# EAGLE board hwreset_v2 (EAGLE 6.1)
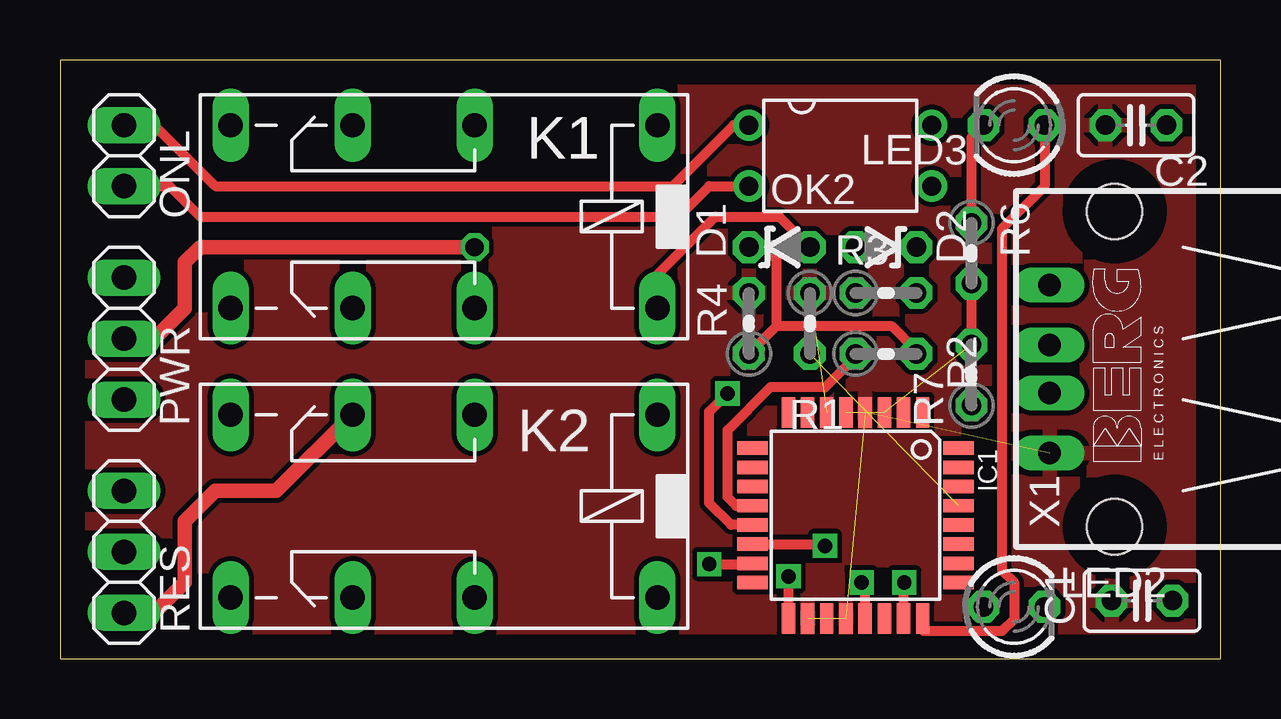
[diagram p0: board, top side]
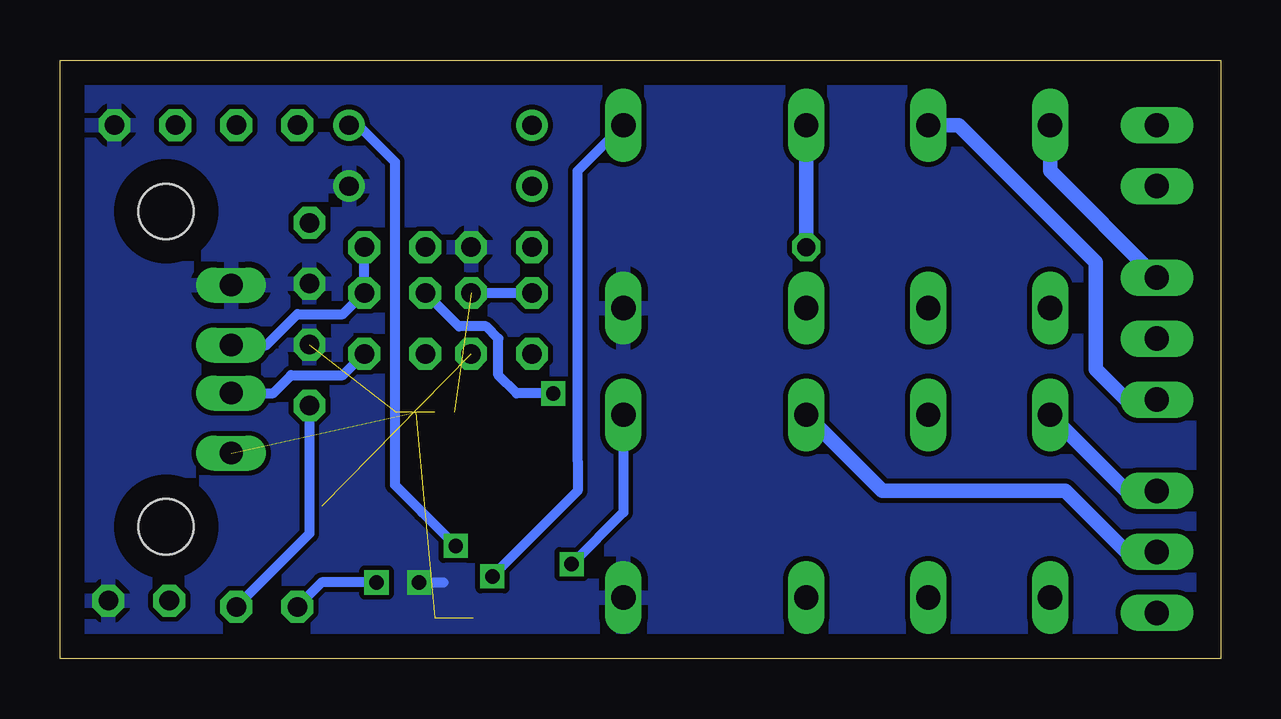
[diagram p1: board, bottom side, seen from below]

Size 48.37 x 24.94 mm. Coordinates in mm from the lower left corner, seen from the top.
Outline: 0,0 48.37,0 48.37,24.94 0,24.94 0,0
Copper layers (1*16): Top 0.035mm / dielectric 1.5mm / Bottom 0.035mm
Design rules: minimum track width 10mil, minimum drill 24mil, track to track 8mil, track to pad 8mil, pad to pad 8mil, via to via 8mil, smd to smd 8mil, copper to edge 40mil, drill to drill 8mil, minimum pad ring 10mil, minimum via ring 8mil, stop-mask expansion 4mil, vias tented up to drill 0mil, thermal gap 10mil

## Footprints (pad centres in the part's own frame; a part is rotated, then mirrored left to right if it is on the bottom)
C025-025X050 = drill 0.813 octagon: 1 -1.27,0; 2 1.27,0
ZDIO-2.5 = drill 0.813 octagon: A 1.27,0; C -1.27,0
TQFP32-08 = smd 1.27 x 0.559: 1 -4.293,2.8; 2 -4.293,2; 3 -4.293,1.2; 4 -4.293,0.4; 5 -4.293,-0.4; 6 -4.293,-1.2; 7 -4.293,-2; 8 -4.293,-2.8; 17 4.293,-2.8; 18 4.293,-2; 19 4.293,-1.2; 20 4.293,-0.4; 21 4.293,0.4; 22 4.293,1.2; 23 4.293,2; 24 4.293,2.8 | smd 0.559 x 1.27: 9 -2.8,-4.293; 10 -2,-4.293; 11 -1.2,-4.293; 12 -0.4,-4.293; 13 0.4,-4.293; 14 1.2,-4.293; 15 2,-4.293; 16 2.8,-4.293; 25 2.8,4.293; 26 2,4.293; 27 1.2,4.293; 28 0.4,4.293; 29 -0.4,4.293; 30 -1.2,4.293; 31 -2,4.293; 32 -2.8,4.293
351 = drill 1.016 long: 1 -3.81,-3.81; 16 -3.81,3.81; O1 8.89,-3.81; O2 8.89,3.81; P1 3.81,-3.81; P2 3.81,3.81; S1 13.97,-3.81; S2 13.97,3.81
LED3MM = drill 0.813 octagon: A -1.27,0; K 1.27,0
DIP4 = drill 0.8: 1 -1.27,-3.81; 2 1.27,-3.81; 3 1.27,3.81; 4 -1.27,3.81
1X02 = drill 1.016 long: 1 -1.27,0; 2 1.27,0
1X03 = drill 1.016 long: 1 -2.54,0; 2 0,0; 3 2.54,0
0204V = drill 0.813 octagon: 1 -1.27,0; 2 1.27,0
PN87520 = drill 0.95 long: 1 -3.5,2.71; 2 -1,2.71; 3 1,2.71; 4 3.5,2.71 | hole 2.3: -6.57,0; 6.57,0

## Placement (x,y rotation side)
C1  100n  [C025-025X050]  45.09,2.41 0 top
C2  100n  [C025-025X050]  44.83,22.22 0 top
D1  3.3  [ZDIO-2.5]  29.97,17.14 0 top
D2  3.3  [ZDIO-2.5]  34.42,17.14 180 top
IC1  MEGA8-AI  [TQFP32-08]  33.15,5.97 270 top
K1  351  [351]  21.08,18.41 180 top
K2  351  [351]  21.08,6.35 180 top
LED2  [LED3MM]  39.75,2.16 0 top
LED3  [LED3MM]  39.75,22.22 180 top
OK2  SFH618A-3  [DIP4]  32.51,20.95 270 top
ONL  [1X02]  2.67,20.95 90 top
PWR  [1X03]  2.67,13.34 90 top
R1  5k  [0204V]  31.24,13.97 270 top
R2  68  [0204V]  34.42,12.7 0 top
R3  68  [0204V]  34.42,15.24 0 top
R4  2k2  [0204V]  28.7,13.97 90 top
R6  200  [0204V]  37.97,16.89 270 top
R7  200  [0204V]  37.97,11.81 90 top
RES  [1X03]  2.67,4.45 90 top
X1  [PN87520]  43.94,12.06 90 top

## Library data of the parts
C1 C2 R1-R4 R6 R7 = rcl
D1 D2 = diode
IC1 = atmel; MPN: ATMEGA8-16AU; OC_FARNELL: 9171371; OC_NEWARK: 73M8863
K1 K2 = relay; OC_FARNELL: unknown; OC_NEWARK: unknown
LED2 LED3 = led
OK2 = optocoupler; MF: VISHAY/TELEFUNKEN; MPN: SFH618A-3; OC_FARNELL: 1020374; OC_NEWARK: 58K2209
ONL PWR RES = pinhead
X1 = con-berg; OC_FARNELL: unknown; OC_NEWARK: unknown

## Nets
+5V: C1.1 C2.1 IC1.4 IC1.6 IC1.18 IC1.20 R1.1 R4.2 X1.1
GND: C1.2 C2.2 D1.A IC1.3 IC1.5 IC1.21 K1.16 K2.16 OK2.3 R6.2 R7.2 X1.4
N$1: IC1.29 R1.2
N$2: IC1.17 K1.1
N$3: K2.P1 RES.2
N$4: IC1.12 R2.1
N$5: IC1.13 R3.1
N$6: K1.P1 PWR.2
N$7: D2.A
N$8: D1.C R2.2 R4.1 X1.2
N$9: D2.C R3.2 X1.3
N$10: K1.O1 PWR.1
N$11: K1.S1 PWR.3
N$12: K2.O1 RES.1
N$13: K2.S1 RES.3
N$14: OK2.1 ONL.2
N$15: OK2.2 ONL.1
N$16: IC1.14 OK2.4
N$17: IC1.23 LED2.A
N$18: IC1.15 K2.1
N$19: IC1.24 LED3.A
N$20: LED2.K R7.1
N$21: LED3.K R6.1

## Tracks (layer width: path | path; a pad name or v marks a point on that pad's centre or on a via)
+5V  (4 unrouted)
  Bottom 0.406: R1.1 R4.2
  pour Top: 0,25.02 48.39,25.02 48.39,0 0,0
GND  (via drill 0.6)  (2 unrouted)
  Top 0.406: IC1.21 33.55,3.03 v33.4,3.17 | K1.16 24.89,16 27.3,18.41 29.97,18.41 D1.A | R6.2 R7.2
  Bottom 0.406: v33.4,3.17 32.38,3.17
  pour Bottom: 0,25.02 48.39,25.02 48.39,0 0,0
N$1  (1 unrouted)
N$2  (via drill 0.6)
  Top 0.406: v30.35,3.43 IC1.17
  Bottom 0.406: K1.1 26.8,20.32 26.8,11.43 26.8,8.26 26.8,6.99 v30.35,3.43
N$3
  Bottom 0.61: RES.2 3.94,4.45 6.48,6.99 14.1,6.99 K2.P1
N$4
  Top 0.406: R2.1 33.15,12.57 31.88,11.3 29.59,11.3 27.81,9.53 27.81,6.73 28.18,6.37 IC1.12
N$5  (via drill 0.6)
  Top 0.406: IC1.13 27.96,5.57 27.05,6.48 27.05,10.29 v27.81,11.05
  Bottom 0.406: v27.81,11.05 29.34,11.05 30.1,11.81 30.1,13.34 30.61,13.84 31.75,13.84 R3.1
N$6  (via drill 0.76)
  Top 0.61: PWR.2 3.94,13.34 5.21,14.61 5.21,16.51 5.84,17.14 v17.27,17.14
  Bottom 0.61: v17.27,17.14 K1.P1
N$8
  Top 0.406: R2.2 35.69,12.83 34.67,13.84 29.84,13.84 | 29.84,13.84 R4.1 | D1.C 29.34,17.14 29.84,16.64 29.84,13.84
  Bottom 0.406: X1.2 39.48,11.06 38.73,11.81 36.58,11.81 R2.2
N$9
  Bottom 0.406: D2.C R3.2 36.58,14.35 38.48,14.35 39.77,13.06 X1.3
N$10
  Bottom 0.61: K1.O1 10.92,22.22 5.21,16.51 5.21,12.06 3.94,10.79 PWR.1
N$11
  Bottom 0.61: PWR.3 7.11,20.32 K1.S1
N$12
  Top 0.61: RES.1 3.94,1.91 5.21,3.17 5.21,5.71 6.48,6.99 9.02,6.99 K2.O1
N$13
  Bottom 0.61: RES.3 3.94,6.99 K2.S1
N$14
  Top 0.406: ONL.2 3.94,22.22 6.48,19.68 25.53,19.68 27.94,22.1 | 27.94,22.1 28.07,22.22 | OK2.1 28.07,22.22 | 28.07,22.22 27.94,22.1
N$15
  Top 0.406: ONL.1 4.57,19.68 5.84,18.41 25.78,18.41 27.05,19.68 OK2.2
N$16  (via drill 0.6)
  Top 0.406: IC1.14 31.95,4.77 v31.88,4.7
  Bottom 0.406: OK2.4 35.94,22.22 34.92,21.21 34.67,20.95 34.42,20.7 34.42,7.24 33.27,6.1 | 33.27,6.1 v31.88,4.7 33.27,6.1
N$17  (via drill 0.6)
  Top 0.406: IC1.23 35.15,3.14 v35.18,3.17
  Bottom 0.406: v35.18,3.17 37.46,3.17 LED2.A
N$18  (via drill 0.6)
  Top 0.406: v27.05,3.94 28.82,3.94 IC1.15
  Bottom 0.406: K2.1 24.89,7.37 24.89,6.1 v27.05,3.94
N$19
  Top 0.406: LED3.A 41.02,19.68 39.24,17.91 39.24,3.68 39.75,3.17 39.75,1.65 39.24,1.14 35.97,1.14 IC1.24
N$20
  Bottom 0.406: R7.1 37.97,5.21 LED2.K
N$21
  Top 0.406: LED3.K 37.97,21.72 R6.1